# Altium PCB GateDrive.PcbDoc (part 4 of 4)
Units mm, origin at the board's own origin, x right, y up, seen from the top; angles counter-clockwise.
Board outline 204.3 x 129.8 mm, 4 copper layers (Top Layer, Internal Plane 1, Internal Plane 2, Bottom Layer), stack 0.778 mm thick; 412 components, 227 nets, 1153 pads, 570 vias.
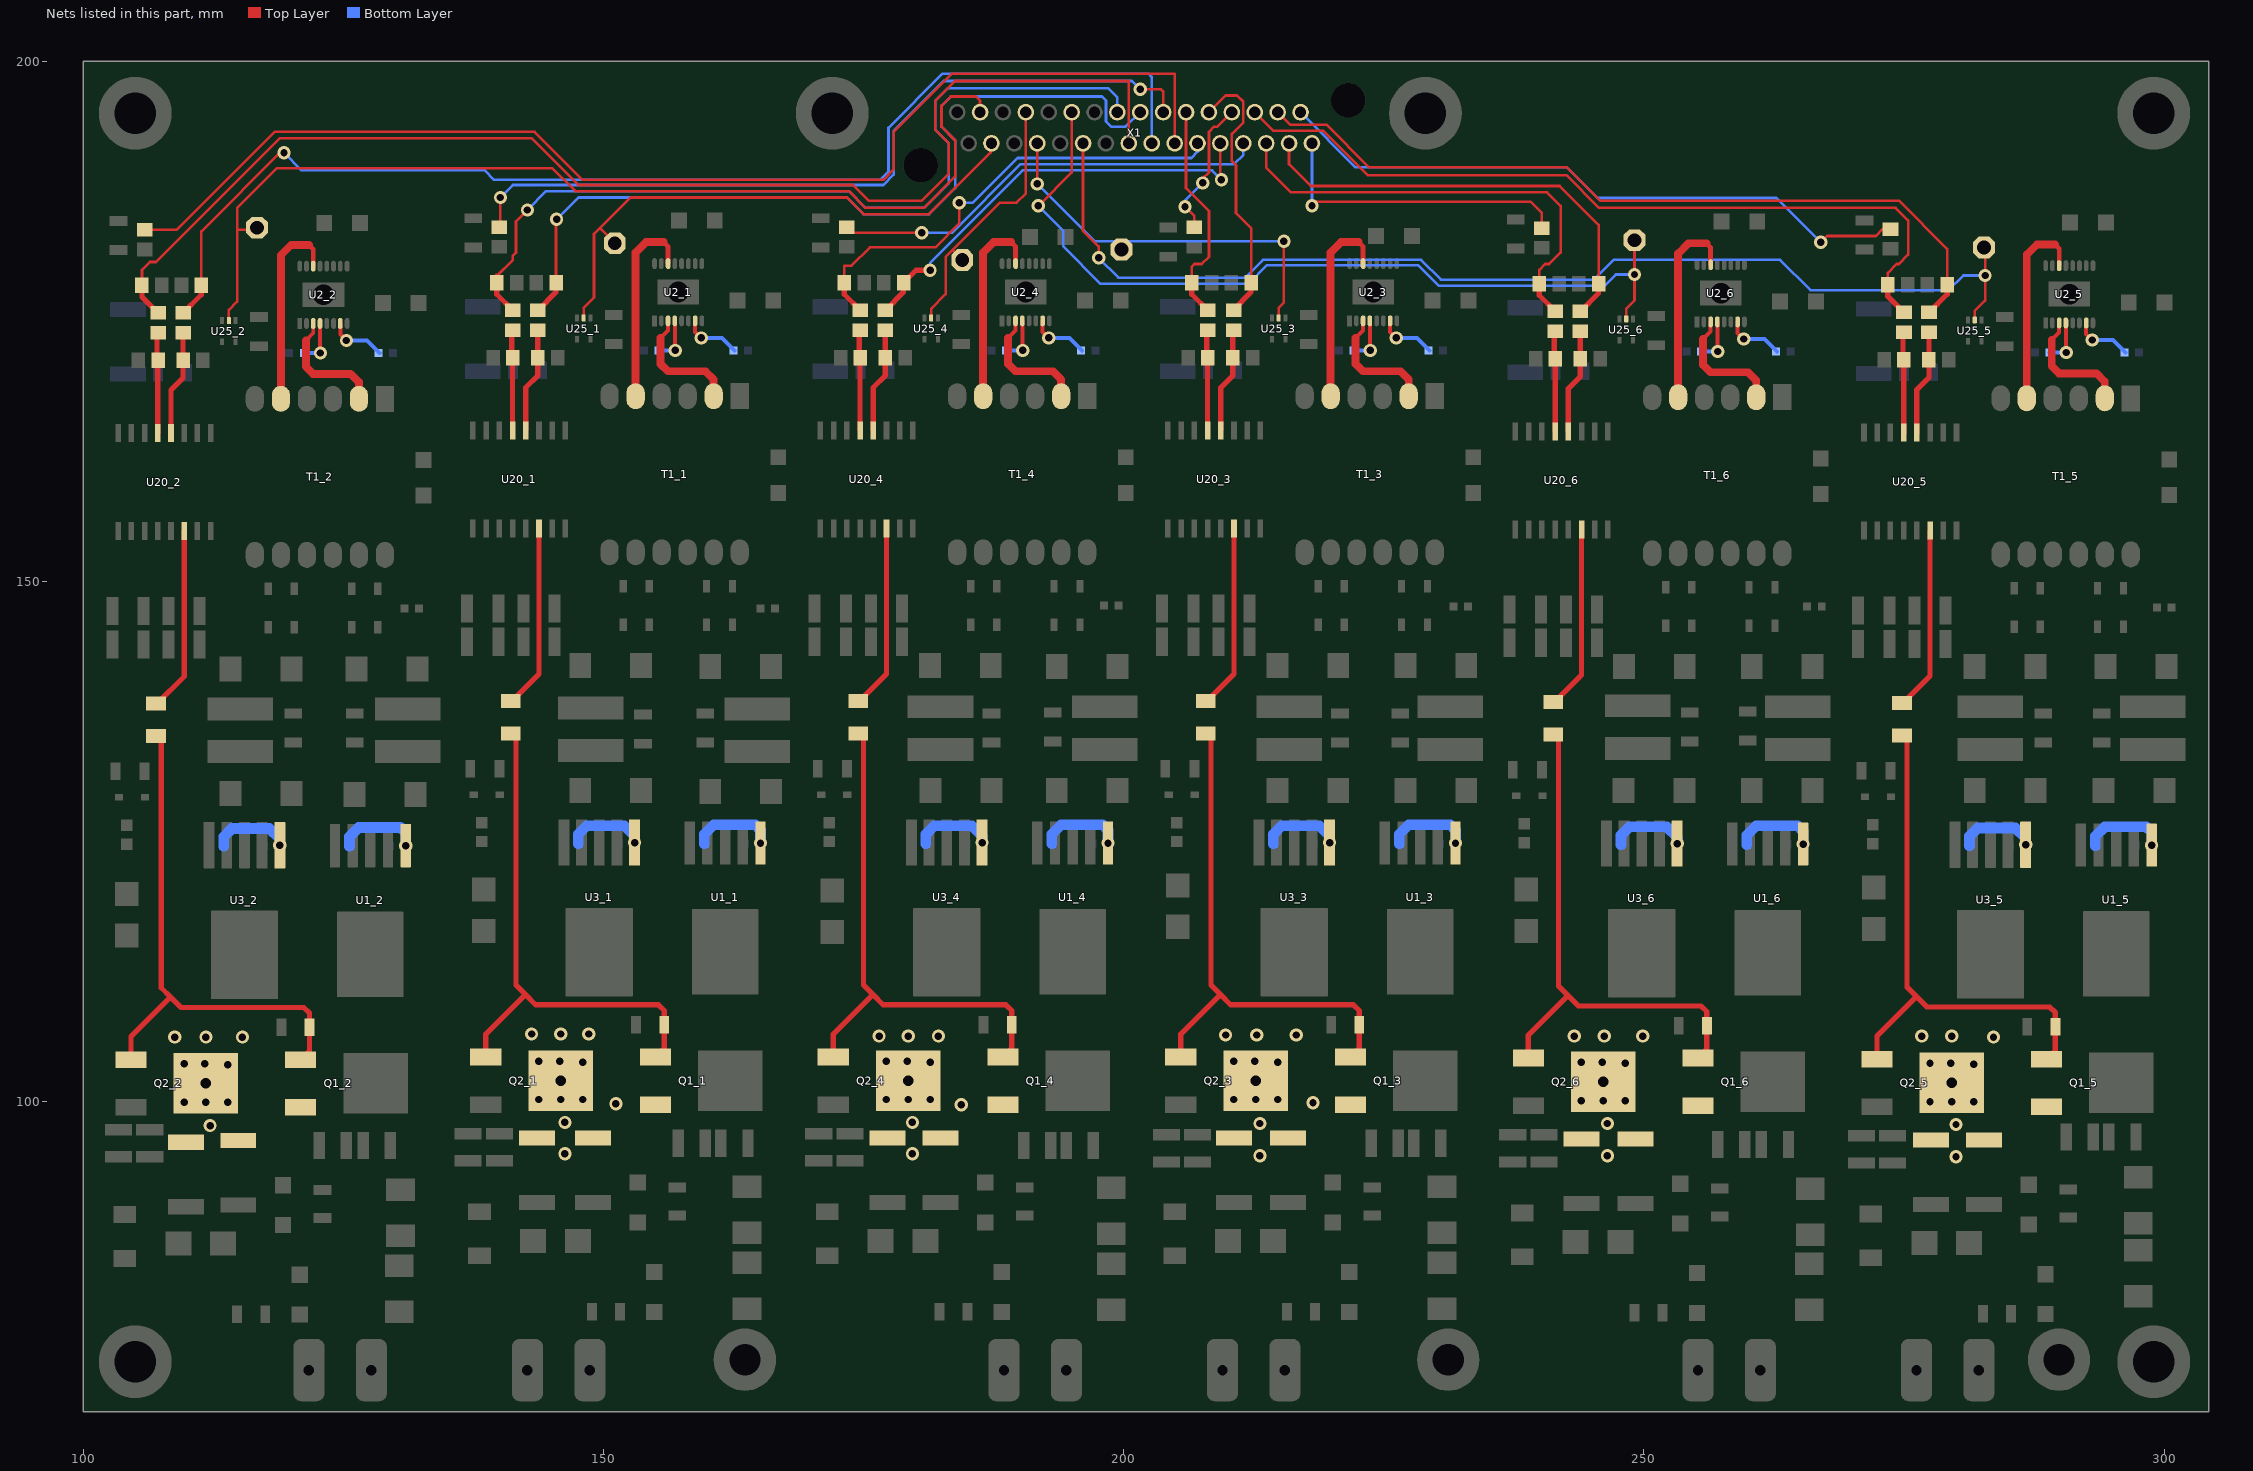
[diagram p5: the nets of this part, all layers, seen from the top]

## Via types
v1: diameter 1.27, hole 0.711, Top Layer to Bottom Layer, 510 vias
v2: diameter 2, hole 1, Top Layer to Bottom Layer, 54 vias
v3: diameter 1.5, hole 1, Top Layer to Bottom Layer, 6 vias

## Nets (pads, with @x,y where several pads share a name; then routed paths per layer and width w, separated by ;. In a path a pad name is that pad's centre, name@x,y a point inside that pad or via, vN(x,y) a via of type N, cw(c..) or ccw(c..) an arc to the next point about the centre after c; other vN are vias at no path point) (continued)
NetQ1_1_1: Q1_1.1 Q2_1.1 R40_1.2 RB1_1.2 | length 52.1
  Top Layer w0.508: Q2_1.1@138.7,104.29 138.7,106.5 142.5,110.3 ; RB1_1.2@141.1,135.4 141.6,134.9 141.6,111.2 142.5,110.3 ; Q1_1.1@155,104.29 155.85,105.14 R40_1.2@155.85,107.4 155.85,108.75 155.3,109.3 143.5,109.3 142.5,110.3
NetQ1_1_3: Q1_1.3 Q2_1.4 RG1_1.1 RG2_1.1
  other v1: 146.3,95 146.3,98 151.2,99.8 143.8,100.2 145.9,100.2 148,100.2 148,103.8 143.8,103.9 145.8,103.9 143.1,106.5 145.9,106.5 148.6,106.5
  other v2: 145.9,102
NetQ1_2_1: Q1_2.1 Q2_2.1 R40_2.2 RB1_2.2 | length 52.1
  Top Layer w0.508: Q2_2.1@104.6,104.04 104.6,106.25 108.4,110.05 ; RB1_2.2@107,135.15 107.5,134.65 107.5,110.95 108.4,110.05 ; Q1_2.1@120.9,104.04 121.75,104.89 R40_2.2@121.75,107.15 121.75,108.5 121.2,109.05 109.4,109.05 108.4,110.05
NetQ1_2_3: Q1_2.3 Q2_2.4 RG1_2.1 RG2_2.1
  other v1: 112.2,97.7 109.7,99.95 111.8,99.95 113.9,99.95 113.9,103.55 109.7,103.65 111.7,103.65 108.8,106.2 111.8,106.2 115.3,106.2
  other v2: 111.8,101.75
NetQ1_3_1: Q1_3.1 Q2_3.1 R40_3.2 RB1_3.2 | length 52.1
  Top Layer w0.508: Q2_3.1@205.5,104.29 205.5,106.5 209.3,110.3 ; RB1_3.2@207.9,135.4 208.4,134.9 208.4,111.2 209.3,110.3 ; Q1_3.1@221.8,104.29 222.65,105.14 R40_3.2@222.65,107.4 222.65,108.75 222.1,109.3 210.3,109.3 209.3,110.3
NetQ1_3_3: Q1_3.3 Q2_3.4 RG1_3.1 RG2_3.1
  other v1: 213.1,94.8 213.1,97.9 218.2,99.9 210.6,100.2 212.7,100.2 214.8,100.2 214.8,103.8 210.6,103.9 212.6,103.9 209.8,106.4 212.8,106.4 216.6,106.4
  other v2: 212.7,102
NetQ1_4_1: Q1_4.1 Q2_4.1 R40_4.2 RB1_4.2 | length 52.1
  Top Layer w0.508: Q2_4.1@172.1,104.29 172.1,106.5 175.9,110.3 ; RB1_4.2@174.5,135.4 175,134.9 175,111.2 175.9,110.3 ; Q1_4.1@188.4,104.29 189.25,105.14 R40_4.2@189.25,107.4 189.25,108.75 188.7,109.3 176.9,109.3 175.9,110.3
NetQ1_4_3: Q1_4.3 Q2_4.4 RG1_4.1 RG2_4.1
  other v1: 179.7,95 179.7,98 184.4,99.7 177.2,100.2 179.3,100.2 181.4,100.2 181.4,103.8 177.2,103.9 179.2,103.9 176.5,106.3 179.3,106.3 182.2,106.3
  other v2: 179.3,102
NetQ1_5_1: Q1_5.1 Q2_5.1 R40_5.2 RB1_5.2 | length 52.1
  Top Layer w0.508: Q2_5.1@272.4,104.09 272.4,106.3 276.2,110.1 ; RB1_5.2@274.8,135.2 275.3,134.7 275.3,111 276.2,110.1 ; Q1_5.1@288.7,104.09 289.55,104.94 R40_5.2@289.55,107.2 289.55,108.55 289,109.1 277.2,109.1 276.2,110.1
NetQ1_5_3: Q1_5.3 Q2_5.4 RG1_5.1 RG2_5.1
  other v1: 280,94.7 280,97.8 277.5,100 279.6,100 281.7,100 281.7,103.6 277.5,103.7 279.5,103.7 283.6,106.2 276.7,106.3 279.6,106.3
  other v2: 279.6,101.8
NetQ1_6_1: Q1_6.1 Q2_6.1 R40_6.2 RB1_6.2 | length 52.1
  Top Layer w0.508: Q2_6.1@238.9,104.19 238.9,106.4 242.7,110.2 ; RB1_6.2@241.3,135.3 241.8,134.8 241.8,111.1 242.7,110.2 ; Q1_6.1@255.2,104.19 256.05,105.04 R40_6.2@256.05,107.3 256.05,108.65 255.5,109.2 243.7,109.2 242.7,110.2
NetQ1_6_3: Q1_6.3 Q2_6.4 RG1_6.1 RG2_6.1
  other v1: 246.5,94.8 246.5,97.9 244,100.1 246.1,100.1 248.2,100.1 248.2,103.7 244,103.8 246,103.8 243.3,106.3 246.2,106.3 249.9,106.3
  other v2: 246.1,101.9
NetR1_1_1: R1_1.1 R2_1.2 U1_1.1 | length 8.1
  Bottom Layer w1.016: R1_1.1@159.7,124.8 159.7,125.7 160.6,126.6 164.6,126.6 165.1,126.1 v1(165.1,124.85)
NetR1_2_1: R1_2.1 R2_2.2 U1_2.1 | length 8.1
  Bottom Layer w1.016: R1_2.1@125.6,124.55 125.6,125.45 126.5,126.35 130.5,126.35 131,125.85 v1(131,124.6)
NetR1_3_1: R1_3.1 R2_3.2 U1_3.1 | length 8.1
  Bottom Layer w1.016: R1_3.1@226.5,124.8 226.5,125.7 227.4,126.6 231.4,126.6 231.9,126.1 v1(231.9,124.85)
NetR1_4_1: R1_4.1 R2_4.2 U1_4.1 | length 8.1
  Bottom Layer w1.016: R1_4.1@193.1,124.8 193.1,125.7 194,126.6 198,126.6 198.5,126.1 v1(198.5,124.85)
NetR1_5_1: R1_5.1 R2_5.2 U1_5.1 | length 8.1
  Bottom Layer w1.016: R1_5.1@293.4,124.6 293.4,125.5 294.3,126.4 298.3,126.4 298.8,125.9 v1(298.8,124.65)
NetR1_6_1: R1_6.1 R2_6.2 U1_6.1 | length 8.1
  Bottom Layer w1.016: R1_6.1@259.9,124.7 259.9,125.6 260.8,126.5 264.8,126.5 265.3,126 v1(265.3,124.75)
NetR3_1_1: R3_1.1 U2_1.4 | length 4.5
  Top Layer w0.381: U2_1.4@156.864,175.044 156.864,172.236 v1(156.9,172.2)
  Bottom Layer w0.381: R3_1.1@155.3,172.2 v1(156.9,172.2)
NetR3_2_1: R3_2.1 U2_2.4 | length 4.5
  Top Layer w0.381: U2_2.4@122.764,174.794 122.764,171.986 v1(122.8,171.95)
  Bottom Layer w0.381: R3_2.1@121.2,171.95 v1(122.8,171.95)
NetR3_3_1: R3_3.1 U2_3.4 | length 4.5
  Top Layer w0.381: U2_3.4@223.664,175.044 223.664,172.236 v1(223.7,172.2)
  Bottom Layer w0.381: R3_3.1@222.1,172.2 v1(223.7,172.2)
NetR3_4_1: R3_4.1 U2_4.4 | length 4.5
  Top Layer w0.381: U2_4.4@190.264,175.044 190.264,172.236 v1(190.3,172.2)
  Bottom Layer w0.381: R3_4.1@188.7,172.2 v1(190.3,172.2)
NetR3_5_1: R3_5.1 U2_5.4 | length 4.5
  Top Layer w0.381: U2_5.4@290.564,174.844 290.564,172.036 v1(290.6,172)
  Bottom Layer w0.381: R3_5.1@289,172 v1(290.6,172)
NetR3_6_1: R3_6.1 U2_6.4 | length 4.5
  Top Layer w0.381: U2_6.4@257.064,174.944 257.064,172.136 v1(257.1,172.1)
  Bottom Layer w0.381: R3_6.1@255.5,172.1 v1(257.1,172.1)
NetR4_1_1: R4_1.1 U2_1.7 | length 5.6
  Top Layer w0.381: U2_1.7@158.814,175.044 158.814,173.986 v1(159.4,173.4)
  Bottom Layer w0.381: v1(159.4,173.4) 161.4,173.4 R4_1.1@162.6,172.2
NetR4_2_1: R4_2.1 U2_2.7 | length 5.6
  Top Layer w0.381: U2_2.7@124.714,174.794 124.714,173.736 v1(125.3,173.15)
  Bottom Layer w0.381: v1(125.3,173.15) 127.3,173.15 R4_2.1@128.5,171.95
NetR4_3_1: R4_3.1 U2_3.7 | length 5.6
  Top Layer w0.381: U2_3.7@225.614,175.044 225.614,173.986 v1(226.2,173.4)
  Bottom Layer w0.381: v1(226.2,173.4) 228.2,173.4 R4_3.1@229.4,172.2
NetR4_4_1: R4_4.1 U2_4.7 | length 5.6
  Top Layer w0.381: U2_4.7@192.214,175.044 192.214,173.986 v1(192.8,173.4)
  Bottom Layer w0.381: v1(192.8,173.4) 194.8,173.4 R4_4.1@196,172.2
NetR4_5_1: R4_5.1 U2_5.7 | length 5.6
  Top Layer w0.381: U2_5.7@292.514,174.844 292.514,173.786 v1(293.1,173.2)
  Bottom Layer w0.381: v1(293.1,173.2) 295.1,173.2 R4_5.1@296.3,172
NetR4_6_1: R4_6.1 U2_6.7 | length 5.6
  Top Layer w0.381: U2_6.7@259.014,174.944 259.014,173.886 v1(259.6,173.3)
  Bottom Layer w0.381: v1(259.6,173.3) 261.6,173.3 R4_6.1@262.8,172.1
NetR6_1_1: R6_1.1 R7_1.2 U3_1.1 | length 7.6
  Bottom Layer w1.016: R6_1.1@147.6,124.8 147.6,125.7 148.4,126.5 152,126.5 153,125.5 v1(153,124.9)
NetR6_2_1: R6_2.1 R7_2.2 U3_2.1 | length 7.6
  Bottom Layer w1.016: R6_2.1@113.5,124.55 113.5,125.45 114.3,126.25 117.9,126.25 118.9,125.25 v1(118.9,124.65)
NetR6_3_1: R6_3.1 R7_3.2 U3_3.1 | length 7.6
  Bottom Layer w1.016: R6_3.1@214.4,124.8 214.4,125.7 215.2,126.5 218.8,126.5 219.8,125.5 v1(219.8,124.9)
NetR6_4_1: R6_4.1 R7_4.2 U3_4.1 | length 7.6
  Bottom Layer w1.016: R6_4.1@181,124.8 181,125.7 181.8,126.5 185.4,126.5 186.4,125.5 v1(186.4,124.9)
NetR6_5_1: R6_5.1 R7_5.2 U3_5.1 | length 7.6
  Bottom Layer w1.016: R6_5.1@281.3,124.6 281.3,125.5 282.1,126.3 285.7,126.3 286.7,125.3 v1(286.7,124.7)
NetR6_6_1: R6_6.1 R7_6.2 U3_6.1 | length 7.6
  Bottom Layer w1.016: R6_6.1@247.8,124.7 247.8,125.6 248.6,126.4 252.2,126.4 253.2,125.4 v1(253.2,124.8)
NetR45_1_1: R45_1.1 R94_1.1 U20_1.13 | length 9.7
  Top Layer w0.508: R94_1.1@141.2,174.15 141.2,171.54 141.27,171.47 U20_1.13@141.27,164.5
NetR45_2_1: R45_2.1 R94_2.1 U20_2.13 | length 9.7
  Top Layer w0.508: R94_2.1@107.1,173.9 107.1,171.29 107.17,171.22 U20_2.13@107.17,164.25
NetR45_3_1: R45_3.1 R94_3.1 U20_3.13 | length 9.7
  Top Layer w0.508: R94_3.1@208,174.15 208,171.54 208.07,171.47 U20_3.13@208.07,164.5
NetR45_4_1: R45_4.1 R94_4.1 U20_4.13 | length 9.7
  Top Layer w0.508: R94_4.1@174.6,174.15 174.6,171.54 174.67,171.47 U20_4.13@174.67,164.5
NetR45_5_1: R45_5.1 R94_5.1 U20_5.13 | length 9.7
  Top Layer w0.508: R94_5.1@274.9,173.95 274.9,171.34 274.97,171.27 U20_5.13@274.97,164.3
NetR45_6_1: R45_6.1 R94_6.1 U20_6.13 | length 9.7
  Top Layer w0.508: R94_6.1@241.4,174.05 241.4,171.44 241.47,171.37 U20_6.13@241.47,164.4
NetR46_1_1: R46_1.1 R93_1.1 U20_1.12 | length 10.1
  Top Layer w0.508: U20_1.12@142.54,164.5 142.54,168.64 143.7,169.8 R46_1.1@143.7,171.5 R93_1.1@143.7,174.15
NetR46_2_1: R46_2.1 R93_2.1 U20_2.12 | length 10.1
  Top Layer w0.508: U20_2.12@108.44,164.25 108.44,168.39 109.6,169.55 R46_2.1@109.6,171.25 R93_2.1@109.6,173.9
NetR46_3_1: R46_3.1 R93_3.1 U20_3.12 | length 10.1
  Top Layer w0.508: U20_3.12@209.34,164.5 209.34,168.64 210.5,169.8 R46_3.1@210.5,171.5 R93_3.1@210.5,174.15
NetR46_4_1: R46_4.1 R93_4.1 U20_4.12 | length 10.1
  Top Layer w0.508: U20_4.12@175.94,164.5 175.94,168.64 177.1,169.8 R46_4.1@177.1,171.5 R93_4.1@177.1,174.15
NetR46_5_1: R46_5.1 R93_5.1 U20_5.12 | length 10.1
  Top Layer w0.508: U20_5.12@276.24,164.3 276.24,168.44 277.4,169.6 R46_5.1@277.4,171.3 R93_5.1@277.4,173.95
NetR46_6_1: R46_6.1 R93_6.1 U20_6.12 | length 10.1
  Top Layer w0.508: U20_6.12@242.74,164.4 242.74,168.54 243.9,169.7 R46_6.1@243.9,171.4 R93_6.1@243.9,174.05
NetR47_1_2: R47_1.2 X1.19 | length 76.1
  Top Layer w0.254: R47_1.2@140,184.05 140.1,184.15 v1(140.1,186.9) ; v1(201.6,197.3) 203.6,197.3 203.8,197.1 X1.19@203.8,195.1
  Bottom Layer w0.254: v1(140.1,186.9) 141.3,188.1 176.9,188.1 177.9,189.1 177.9,193.3 182.7,198.1 200.8,198.1 v1(201.6,197.3)
NetR47_2_2: R47_2.2 X1.20 | length 117.8
  Top Layer w0.254: R47_2.2@105.9,183.8 109,183.8 118.4,193.2 143.4,193.2 148,188.6 176.9,188.6 177.9,189.6 177.9,193.2 183.5,198.8 204.9,198.8 X1.20@204.9,192.1
NetR47_3_2: R47_3.2 X1.25 | length 13.5
  Top Layer w0.254: v1(205.9,186) 206.8,185.1 R47_3.2@206.8,184.05 ; v1(207.6,188.3) 207.6,188.7 208.2,189.3 208.2,193.2 208.7,193.7 209,193.7 X1.25@210.4,195.1
  Bottom Layer w0.254: v1(205.9,186) 205.9,186.6 v1(207.6,188.3)
NetR47_4_2: R47_4.2 X1.26 | length 42.5
  Top Layer w0.254: R47_4.2@173.4,184.05 173.95,183.5 v1(180.6,183.5)
  Bottom Layer w0.254: v1(180.6,183.5) 183.5,183.5 190.1,190.1 210.6,190.1 211.5,191 X1.26@211.5,192.1
NetR47_5_2: R47_5.2 X1.31 | length 62.4
  Top Layer w0.254: v1(267,182.6) 267.6,183.2 272.3,183.2 272.95,183.85 R47_5.2@273.7,183.85
  Bottom Layer w0.254: X1.31@217,195.1 222.3,189.8 242.6,189.8 245.55,186.85 262.75,186.85 v1(267,182.6)
NetR47_6_2: R47_6.2 X1.32 | length 30.2
  Top Layer w0.254: v1(218.1,186.1) 218.5,186.5 239.1,186.5 240.2,185.4 R47_6.2@240.2,183.95
  Bottom Layer w0.254: v1(218.1,186.1) X1.32@218.1,192.1
NetR93_1_2: R93_1.2 R95_1.1 X1.17 | length 81.2
  Top Layer w0.254: R95_1.1@145.45,178.7 v1@145.45,184.75
  Top Layer w0.508: R93_1.2@143.7,176.05 145.45,177.8 R95_1.1@145.45,178.7 ; v1@145.45,184.75 v1(145.5,184.8)
  Bottom Layer w0.254: v1(145.5,184.8) 147.6,186.9 173.4,186.9 175,185.3 181.3,185.3 183.8,187.8 183.8,192.4 182.5,193.7 182.5,195.7 183.4,196.6 197.9,196.6 198.3,196.2 198.3,194.2 198.8,193.7 200.2,193.7 X1.17@201.6,195.1
NetR93_2_2: R93_2.2 R95_2.1 X1.18 | length 117.7
  Top Layer w0.254: R95_2.1@111.35,178.45 111.35,183.65 119.2,191.5 119.3,191.4 v1(119.3,191.2)
  Top Layer w0.508: R93_2.2@109.6,175.8 111.35,177.55 R95_2.1@111.35,178.45
  Bottom Layer w0.254: v1(119.3,191.2) 121,189.5 138.6,189.5 139.5,188.6 176.6,188.6 177.4,189.4 177.4,193.6 182.6,198.8 202.4,198.8 202.7,198.5 X1.18@202.7,192.1
NetR93_3_2: R93_3.2 R95_3.1 X1.23 | length 26.2
  Top Layer w0.254: X1.23@208.2,195.1 209.8,196.7 210.9,196.7 211.5,196.1 211.5,194.1 210.4,193 210.4,190.4 210.8,190 210.8,185.4 212.25,183.95 R95_3.1@212.25,178.7
  Top Layer w0.508: R93_3.2@210.5,176.05 212.25,177.8 R95_3.1@212.25,178.7
NetR93_4_2: R93_4.2 R95_4.1 X1.24 | length 42.7
  Top Layer w0.254: X1.24@209.3,192.1 209.3,188.7 v1(209.4,188.6)
  Top Layer w0.508: R93_4.2@177.1,176.05 178.85,177.8 R95_4.1@178.85,178.7 180.05,179.9 v1(181.4,179.9)
  Bottom Layer w0.254: v1(181.4,179.9) 181.4,180.6 190.3,189.5 208.5,189.5 v1(209.4,188.6)
NetR93_5_2: R93_5.2 R95_5.1 X1.29 | length 76.6
  Top Layer w0.254: X1.29@214.8,195.1 216,193.9 219.5,193.9 223.6,189.8 242.6,189.8 245.8,186.6 274.5,186.6 279.15,181.95 R95_5.1@279.15,178.5
  Top Layer w0.508: R93_5.2@277.4,175.85 279.15,177.6 R95_5.1@279.15,178.5
NetR93_6_2: R93_6.2 R95_6.1 X1.30 | length 43.2
  Top Layer w0.254: X1.30@215.9,192.1 215.9,190.1 218,188 241.9,188 245.65,184.25 R95_6.1@245.65,178.6
  Top Layer w0.508: R93_6.2@243.9,175.95 245.65,177.7 R95_6.1@245.65,178.6
NetR94_1_2: R94_1.2 R96_1.1 X1.15 | length 82.6
  Top Layer w0.254: R96_1.1@139.75,179.35 141.3,180.9 141.3,181.3 141.6,181.6 141.6,184.6 v1(142.7,185.7)
  Top Layer w0.508: R96_1.1@139.75,179.35 R96_1.1@139.75,178.7 139.75,177.6 R94_1.2@141.3,176.05
  Bottom Layer w0.254: v1(142.7,185.7) 144.5,187.5 173.6,187.5 175.2,185.9 180.8,185.9 183.2,188.3 183.2,192.1 181.9,193.4 181.9,196.2 183.1,197.4 198.5,197.4 199.4,196.5 X1.15@199.4,195.096
NetR94_2_2: R94_2.2 R96_2.1 X1.16 | length 124.1
  Top Layer w0.254: R96_2.1@105.65,178.45 105.65,179.95 106.4,180.7 107,180.7 118.9,192.6 143.1,192.6 147.6,188.1 174,188.1 175.5,186.6 180.6,186.6 183.2,189.2 183.2,192.1 181.9,193.4 181.9,196.2 183.8,198.1 200.5,198.1 X1.16@200.5,192.1
  Top Layer w0.508: R96_2.1@105.65,178.45 105.65,177.35 R94_2.2@107.2,175.8
NetR94_3_2: R94_3.2 R96_3.1 X1.21 | length 21.7
  Top Layer w0.254: X1.21@206,195.1 206,187.8 208.2,185.6 208.2,181.2 207.5,180.5 206.8,180.5 206.55,180.25 R96_3.1@206.55,178.7
  Top Layer w0.508: R96_3.1@206.55,178.7 206.55,177.6 R94_3.2@208.1,176.05
NetR94_4_2: R94_4.2 R96_4.1 X1.22 | length 45.4
  Top Layer w0.254: R96_4.1@173.15,178.7 173.15,180.35 173.85,180.35 175.6,182.1 181.9,182.1 184.2,184.4 v1(184.2,186.4)
  Top Layer w0.508: R96_4.1@173.15,178.7 173.15,177.6 R94_4.2@174.7,176.05
  Bottom Layer w0.254: v1(184.2,186.4) 185.5,186.4 189.8,190.7 206.5,190.7 207.1,191.3 X1.22@207.1,192.1
NetR94_5_2: R94_5.2 R96_5.1 X1.27 | length 77.5
  Top Layer w0.254: X1.27@212.6,195.1 214.4,193.3 219.2,193.3 223.45,189.05 242.55,189.05 245.7,185.9 274.2,185.9 275.4,184.7 275.4,181.4 274.5,180.5 274.3,180.5 273.45,179.65 R96_5.1@273.45,178.5
  Top Layer w0.508: R96_5.1@273.45,178.5 273.45,177.4 R94_5.2@275,175.85
NetR94_6_2: R94_6.2 R96_6.1 X1.28 | length 44
  Top Layer w0.254: X1.28@213.7,192.1 213.7,189.8 216.1,187.4 240.7,187.4 242,186.1 242,181.6 240.9,180.5 240.5,180.5 239.95,179.95 R96_6.1@239.95,178.6
  Top Layer w0.508: R96_6.1@239.95,178.6 239.95,177.5 R94_6.2@241.5,175.95
NetRB1_1_1: RB1_1.1 U20_1.6 | length 17.8
  Top Layer w0.508: RB1_1.1@141.1,138.5 141.2,138.5 143.81,141.11 U20_1.6@143.81,155.102
NetRB1_2_1: RB1_2.1 U20_2.6 | length 17.8
  Top Layer w0.508: RB1_2.1@107,138.25 107.1,138.25 109.71,140.86 U20_2.6@109.71,154.852
NetRB1_3_1: RB1_3.1 U20_3.6 | length 17.8
  Top Layer w0.508: RB1_3.1@207.9,138.5 208,138.5 210.61,141.11 U20_3.6@210.61,155.102
NetRB1_4_1: RB1_4.1 U20_4.6 | length 17.8
  Top Layer w0.508: RB1_4.1@174.5,138.5 174.6,138.5 177.21,141.11 U20_4.6@177.21,155.102
NetRB1_5_1: RB1_5.1 U20_5.6 | length 17.8
  Top Layer w0.508: RB1_5.1@274.8,138.3 274.9,138.3 277.51,140.91 U20_5.6@277.51,154.902
NetRB1_6_1: RB1_6.1 U20_6.6 | length 17.8
  Top Layer w0.508: RB1_6.1@241.3,138.4 241.4,138.4 244.01,141.01 U20_6.6@244.01,155.002
NetT1_1_2: T1_1.2 U2_1.3 | length 11.8
  Top Layer w0.381: 155.5,173.4 156.214,174.114 U2_1.3@156.214,175.044
  Top Layer w0.762: 155.5,173.4 155.5,170.9 156.2,170.2 159.8,170.2 160.6,169.4 T1_1.2@160.6,167.8
NetT1_1_5: T1_1.5 U2_1.14 | length 19.1
  Top Layer w0.457: 155.8,182.6 156.214,182.186 U2_1.14@156.214,180.544
  Top Layer w0.762: T1_1.5@153.1,167.8 153.1,181.6 154.1,182.6 155.8,182.6
NetT1_2_2: T1_2.2 U2_2.3 | length 11.8
  Top Layer w0.381: 121.4,173.15 122.114,173.864 U2_2.3@122.114,174.794
  Top Layer w0.762: 121.4,173.15 121.4,170.65 122.1,169.95 125.7,169.95 126.5,169.15 T1_2.2@126.5,167.55
NetT1_2_5: T1_2.5 U2_2.14 | length 19.1
  Top Layer w0.457: 121.7,182.35 122.114,181.936 U2_2.14@122.114,180.294
  Top Layer w0.762: T1_2.5@119,167.55 119,181.35 120,182.35 121.7,182.35
NetT1_3_2: T1_3.2 U2_3.3 | length 11.8
  Top Layer w0.381: 222.3,173.4 223.014,174.114 U2_3.3@223.014,175.044
  Top Layer w0.762: 222.3,173.4 222.3,170.9 223,170.2 226.6,170.2 227.4,169.4 T1_3.2@227.4,167.8
NetT1_3_5: T1_3.5 U2_3.14 | length 19.1
  Top Layer w0.457: 222.6,182.6 223.014,182.186 U2_3.14@223.014,180.544
  Top Layer w0.762: T1_3.5@219.9,167.8 219.9,181.6 220.9,182.6 222.6,182.6
NetT1_4_2: T1_4.2 U2_4.3 | length 11.8
  Top Layer w0.381: 188.9,173.4 189.614,174.114 U2_4.3@189.614,175.044
  Top Layer w0.762: 188.9,173.4 188.9,170.9 189.6,170.2 193.2,170.2 194,169.4 T1_4.2@194,167.8
NetT1_4_5: T1_4.5 U2_4.14 | length 19.1
  Top Layer w0.457: 189.2,182.6 189.614,182.186 U2_4.14@189.614,180.544
  Top Layer w0.762: T1_4.5@186.5,167.8 186.5,181.6 187.5,182.6 189.2,182.6
NetT1_5_2: T1_5.2 U2_5.3 | length 11.8
  Top Layer w0.381: 289.2,173.2 289.914,173.914 U2_5.3@289.914,174.844
  Top Layer w0.762: 289.2,173.2 289.2,170.7 289.9,170 293.5,170 294.3,169.2 T1_5.2@294.3,167.6
NetT1_5_5: T1_5.5 U2_5.14 | length 19.1
  Top Layer w0.457: 289.5,182.4 289.914,181.986 U2_5.14@289.914,180.344
  Top Layer w0.762: T1_5.5@286.8,167.6 286.8,181.4 287.8,182.4 289.5,182.4
NetT1_6_2: T1_6.2 U2_6.3 | length 11.8
  Top Layer w0.381: 255.7,173.3 256.414,174.014 U2_6.3@256.414,174.944
  Top Layer w0.762: 255.7,173.3 255.7,170.8 256.4,170.1 260,170.1 260.8,169.3 T1_6.2@260.8,167.7
NetT1_6_5: T1_6.5 U2_6.14 | length 19.1
  Top Layer w0.457: 256,182.5 256.414,182.086 U2_6.14@256.414,180.444
  Top Layer w0.762: T1_6.5@253.3,167.7 253.3,181.5 254.3,182.5 256,182.5
PA8/TIM_CH1: TP2.TP U25_1.2 X1.4 | length 54.3
  Top Layer w0.254: U25_1.2@148.1,175.325 148.1,176.3 149.1,177.3 149.1,183.4 149.75,184.05 ; TP2.TP@151.1,182.5 149.75,183.85 149.75,184.05 ; X1.4@187.3,192.1 187.2,192.1 187.2,191.2 181.3,185.3 175,185.3 173.4,186.9 152.6,186.9 149.75,184.05
PA9/TIM_CH2: TP4.TP U25_3.2 X1.8 | length 37.5
  Top Layer w0.254: v1(191.7,188.2) X1.8@191.7,192.1 ; U25_3.2@214.9,175.325 214.9,176.3 215.4,176.8 v1(215.4,182.7)
  Bottom Layer w0.254: v1(191.7,188.2) 197.2,182.7 v1(215.4,182.7)
PA10/TIM1_CH3: TP6.TP U25_5.2 X1.12 | length 109.1
  Top Layer w0.254: X1.12@196.1,192.1 196.1,183.7 197.6,182.2 v1(197.6,181.1) ; U25_5.2@281.8,175.125 281.8,176 282.8,177 v1(282.8,179.4) 282.8,182 TP6.TP@282.7,182.1
  Bottom Layer w0.254: v1(197.6,181.1) 199.5,179.2 211.7,179.2 213.4,180.9 228.6,180.9 230.5,179 245.2,179 247.1,180.9 263.1,180.9 266,178 279.3,178 280.7,179.4 v1(282.8,179.4)
TIM1_CH1N: TP1.TP U25_2.2 X1.3 | length 99.2
  Top Layer w0.254: U25_2.2@114,175.075 114,176.1 114.8,176.9 114.8,183.8 ; TP1.TP@116.7,184 116.5,183.8 114.8,183.8 ; X1.3@186.2,195.1 186.2,196.2 185.8,196.6 183.4,196.6 182.5,195.7 182.5,193.7 183.8,192.4 183.8,188.9 180.8,185.9 175.2,185.9 173.6,187.5 147.3,187.5 145.1,189.7 118.6,189.7 114.8,185.9 114.8,183.8
TIM1_CH2N: TP3.TP U25_4.2 X1.7 | length 25.9
  Top Layer w0.254: U25_4.2@181.5,175.325 181.5,176.2 182.9,177.6 182.9,181.2 183.5,181.8 ; TP3.TP@184.5,180.9 183.6,181.8 183.5,181.8 ; X1.7@190.6,195.1 190.6,187.3 189.7,186.4 188.1,186.4 183.5,181.8
TIM1_CH3N: TP5.TP U25_6.2 X1.11 | length 81.5
  Top Layer w0.254: v1(191.8,186.1) 195,189.3 X1.11@195,195.1 ; U25_6.2@248.3,175.225 248.3,176.2 249.1,177 v1(249.1,179.5) TP5.TP@249.1,182.8
  Bottom Layer w0.254: v1(191.8,186.1) 194.2,183.7 194.2,182.2 197.8,178.6 212,178.6 213.8,180.4 228.3,180.4 230.3,178.4 246.2,178.4 247.3,179.5 v1(249.1,179.5)
pads on no net: T1_1.6 T1_1.11 T1_2.6 T1_2.11 T1_3.6 T1_3.11 T1_4.6 T1_4.11 T1_5.6 T1_5.11 T1_6.6 T1_6.11 U2_1.2 U2_1.8 U2_1.9 U2_1.12 U2_1.15 U2_2.2 U2_2.8 U2_2.9 U2_2.12 U2_2.15 U2_3.2 U2_3.8 U2_3.9 U2_3.12 U2_3.15 U2_4.2 U2_4.8 U2_4.9 U2_4.12 U2_4.15 U2_5.2 U2_5.8 U2_5.9 U2_5.12 U2_5.15 U2_6.2 U2_6.8 U2_6.9 U2_6.12 U2_6.15 U20_1.4 U20_1.7 U20_2.4 U20_2.7 U20_3.4 U20_3.7 U20_4.4 U20_4.7 U20_5.4 U20_5.7 U20_6.4 U20_6.7 U25_1.1 U25_2.1 U25_3.1 U25_4.1 U25_5.1 U25_6.1 X1.33 X1.34
copper on no net:
  other v1: 117.1,99.55 284.9,99.6 251.4,99.7

## Polygon pours and split planes (outlines as drawn)
-8.5VT5 on Top Layer "-8.5VT5_L01_P428" (solid, pour order 428): 269.6,95.8 275.2,95.8 275.2,102.5 269.6,102.5
-8.5VT6 on Top Layer "-8.5VT6_L01_P426" (solid, pour order 426): 236.1,96 241.7,96 241.7,102.5 241.7,102.6 236.1,102.6
-8.5VT3 on Top Layer "-8.5VT3_L01_P424" (solid, pour order 424): 202.8,96 208.4,96 208.4,102.5 202.8,102.5
-8.5VT4 on Top Layer "-8.5VT4_L01_P422" (solid, pour order 422): 169.4,96 175,96 175,102.5 169.4,102.5
-8.5VT1 on Top Layer "-8.5VT1_L01_P420" (solid, pour order 420): 135.5,96 141.4,96 141.4,102.5 135.5,102.5
-8.5VT2 on Top Layer "-8.5VT2_L01_P418" (solid, pour order 418): 107.7,96.6 107.7,102.5 102,102.5 102,96.6
+15VT5 on Top Layer "+15VT5_L01_P306" (solid, pour order 306): 291.2,102.3 291.2,107.3 301.1,107.3 301.1,94.3 296.2,94.3 296.2,98.5 292.2,98.5 292.2,102.3
+15VT4 on Top Layer "+15VT4_L01_P282" (solid, pour order 282): 190.9,102.5 190.9,107.5 200.8,107.5 200.8,94 195.9,94 195.9,98.7 191.9,98.7 191.9,102.5
+15VT1 on Top Layer "+15VT1_L01_P014" (solid, pour order 14): 157.5,102.5 157.5,107.5 167.4,107.5 167.4,94 162.5,94 162.5,98.7 158.5,98.7 158.5,102.5
NetQ1_4_3 on Top Layer "NETQ1_4_3_L01_P278" (solid, pour order 278): 175.6,107.5 175.6,94.008 185.216,94.008 185.216,98.3 189.5,98.3 189.5,101.508 184.216,101.508 184.216,107.5
COMMON5 on Top Layer "COMMON5_L01_P310" (solid, pour order 310): 289.9,118.8 301,118.8 301.1,118.7 301.1,108.4 291.2,108.4 291.2,109.9 289.9,111.2
COMMON6 on Top Layer "COMMON6_L01_P334" (solid, pour order 334): 256.4,118.9 267.5,118.9 267.6,118.8 267.6,108.5 257.7,108.5 257.7,110 256.4,111.3
IGBT6_G on Top Layer "IGBT6_G_L01_P324" (solid, pour order 324): 240.7,84.1 240.7,80.6 243.7,80.6 247.7,76.6 250.1,76.6 250.1,81.8 250.2,81.9 245.1,81.9 245.1,84.1
+15VT6 on Top Layer "+15VT6_L01_P330" (solid, pour order 330): 257.7,102.4 257.7,107.4 267.4,107.4 267.4,93.9 262.7,93.9 262.7,98.6 258.7,98.6 258.7,102.4
NetQ1_6_3 on Top Layer "NETQ1_6_3_L01_P326" (solid, pour order 326): 242.2,107.4 242.2,93.908 252.016,93.908 252.016,98.2 255.9,98.2 255.9,101.408 251.016,101.408 251.016,107.4
NetQ1_5_3 on Top Layer "NETQ1_5_3_L01_P302" (solid, pour order 302): 275.7,107.3 275.7,93.808 285.516,93.808 285.516,98.4 289.4,98.4 289.4,101.308 284.516,101.308 284.516,107.3
IGBT3_G on Top Layer "IGBT3_G_L01_P252" (solid, pour order 252): 207.3,84.2 207.3,80.7 210.3,80.7 214.3,76.7 216.7,76.7 216.7,81.9 216.8,82 211.7,82 211.7,84.2
NetQ1_3_3 on Top Layer "NETQ1_3_3_L01_P254" (solid, pour order 254): 208.9,107.5 208.9,94.008 218.616,94.008 218.616,98.5 222.5,98.5 222.5,101.508 217.616,101.508 217.616,107.5
+15VT3 on Top Layer "+15VT3_L01_P258" (solid, pour order 258): 224.3,102.5 224.3,107.5 233.9,107.5 233.9,94 229.3,94 229.3,98.7 225.3,98.7 225.3,102.5
NetC8_3_2 on Top Layer "NETC8_3_2_L01_P264" (solid, pour order 264): 209.8,119.8 222.5,119.8 222.5,110.1 221.7,110.1 210.8,110.1 210.8,110.3 209.8,111.3
COMMON4 on Top Layer "COMMON4_L01_P286" (solid, pour order 286): 189.6,119 200.7,119 200.8,118.9 200.8,108.6 190.9,108.6 190.9,110.1 189.6,111.4
IGBT4_G on Top Layer "IGBT4_G_L01_P276" (solid, pour order 276): 173.9,84.2 173.9,80.7 176.9,80.7 180.9,76.7 183.3,76.7 183.3,81.9 183.4,82 178.3,82 178.3,84.2
IGBT2_G on Top Layer "IGBT2_G_L01_P408" (solid, pour order 408): 111.7,91.75 107,91.75 107,88.05 105.7,86.75 101.9,86.75 101.9,83.45 110.8,83.45 110.8,88.15 111.7,89.05
+15VT2 on Top Layer "+15VT2_L01_P400" (solid, pour order 400): 123.4,102.25 123.4,107.25 133.3,107.25 133.3,93.75 128.4,93.75 128.4,98.45 124.4,98.45 124.4,102.25
NetQ1_2_3 on Top Layer "NETQ1_2_3_L01_P404" (solid, pour order 404): 108.2,107.25 108.2,93.758 117.716,93.758 117.716,98.3 121.5,98.3 121.5,101.258 116.716,101.258 116.716,107.25
IGBT2_G on Top Layer "IGBT2_G_L01_P406" (solid, pour order 406): 106.4,83.95 106.4,80.45 109.4,80.45 113.4,76.45 115.8,76.45 115.8,81.65 115.9,81.75 110.8,81.75 110.8,83.95
NetD27_2_2 on Top Layer "NETD27_2_2_L01_P402" (solid, pour order 402): 115.361,82.75 111.591,82.75 111.591,87.523 112.6,88.532 112.6,91.723 117.591,91.723 117.591,85.723
NetD30_2_2 on Top Layer "NETD30_2_2_L01_P398" (solid, pour order 398): 118.4,89.75 121.1,89.75 121.1,90.05 124.6,90.05 124.6,81.95 118.4,81.95
NetC8_2_2 on Top Layer "NETC8_2_2_L01_P396" (solid, pour order 396): 108.9,119.55 121.5,119.55 121.5,109.85 120.8,109.85 109.9,109.85 109.9,110.05 108.9,111.05
COMMON2 on Top Layer "COMMON2_L01_P394" (solid, pour order 394): 122.1,118.75 133.2,118.75 133.3,118.65 133.3,108.35 123.4,108.35 123.4,109.85 122.1,111.15
COMMON3 on Top Layer "COMMON3_L01_P262" (solid, pour order 262): 223,119 234.1,119 234.2,118.9 234.2,108.6 224.3,108.6 224.3,110.1 223,111.4
NetC8_6_2 on Top Layer "NETC8_6_2_L01_P336" (solid, pour order 336): 243.2,119.7 255.2,119.7 255.2,109.9 255.1,110 244.2,110 244.2,110.2 243.2,111.2
NetD30_6_2 on Top Layer "NETD30_6_2_L01_P332" (solid, pour order 332): 252.7,89.9 255.4,89.9 255.4,90.2 259.2,90.2 259.2,82.1 252.7,82.1
NetD27_6_2 on Top Layer "NETD27_6_2_L01_P328" (solid, pour order 328): 249.661,82.9 245.891,82.9 245.891,87.673 246.9,88.682 246.9,91.873 251.891,91.873 251.891,85.873
IGBT6_G on Top Layer "IGBT6_G_L01_P322" (solid, pour order 322): 246,91.9 241.3,91.9 241.3,88.2 240,86.9 236.2,86.9 236.2,83.6 245.1,83.6 245.1,88.3 246,89.2
NetC8_5_2 on Top Layer "NETC8_5_2_L01_P312" (solid, pour order 312): 276.7,119.6 289.4,119.6 289.4,109.9 288.6,109.9 277.7,109.9 277.7,110.1 276.7,111.1
NetD30_5_2 on Top Layer "NETD30_5_2_L01_P308" (solid, pour order 308): 286.2,89.8 288.9,89.8 288.9,90.1 292.7,90.1 292.7,82 286.2,82
NetD27_5_2 on Top Layer "NETD27_5_2_L01_P304" (solid, pour order 304): 283.161,82.8 279.391,82.8 279.391,87.573 280.4,88.582 280.4,91.773 285.391,91.773 285.391,85.773
IGBT5_G on Top Layer "IGBT5_G_L01_P300" (solid, pour order 300): 274.2,84 274.2,80.5 277.2,80.5 281.2,76.5 283.6,76.5 283.6,81.7 283.7,81.8 278.6,81.8 278.6,84
IGBT5_G on Top Layer "IGBT5_G_L01_P298" (solid, pour order 298): 279.5,91.8 274.8,91.8 274.8,88.1 273.5,86.8 269.7,86.8 269.7,83.5 278.6,83.5 278.6,88.2 279.5,89.1
NetC8_4_2 on Top Layer "NETC8_4_2_L01_P288" (solid, pour order 288): 176.4,119.8 189,119.8 189,110.1 188.3,110.1 177.4,110.1 177.4,110.3 176.4,111.3
NetD30_4_2 on Top Layer "NETD30_4_2_L01_P284" (solid, pour order 284): 185.9,90 188.6,90 188.6,90.3 192.4,90.3 192.4,82.2 185.9,82.2
NetD27_4_2 on Top Layer "NETD27_4_2_L01_P280" (solid, pour order 280): 182.861,83 179.091,83 179.091,87.773 180.1,88.782 180.1,91.973 185.091,91.973 185.091,85.973
IGBT4_G on Top Layer "IGBT4_G_L01_P274" (solid, pour order 274): 179.2,92 174.5,92 174.5,88.3 173.2,87 169.4,87 169.4,83.7 178.3,83.7 178.3,88.4 179.2,89.3
NetD30_3_2 on Top Layer "NETD30_3_2_L01_P260" (solid, pour order 260): 219.3,90 222,90 222,90.3 225.8,90.3 225.8,82.2 219.3,82.2
NetD27_3_2 on Top Layer "NETD27_3_2_L01_P256" (solid, pour order 256): 216.261,83 212.491,83 212.491,87.773 213.5,88.782 213.5,91.973 218.491,91.973 218.491,85.973
IGBT3_G on Top Layer "IGBT3_G_L01_P250" (solid, pour order 250): 212.6,92 207.9,92 207.9,88.3 206.6,87 202.8,87 202.8,83.7 211.7,83.7 211.7,88.4 212.6,89.3
NetC8_1_2 on Top Layer "NETC8_1_2_L01_P026" (solid, pour order 26): 143,119.8 155.4,119.8 155.4,110.1 154.9,110.1 144,110.1 144,110.3 143,111.3
COMMON1 on Top Layer "COMMON1_L01_P022" (solid, pour order 22): 156.2,119 167.3,119 167.4,118.9 167.4,108.6 157.5,108.6 157.5,110.1 156.2,111.4
NetD30_1_2 on Top Layer "NETD30_1_2_L01_P016" (solid, pour order 16): 152.5,90 155.2,90 155.2,90.3 159,90.3 159,82.2 152.5,82.2
IGBT1_G on Top Layer "IGBT1_G_L01_P010" (solid, pour order 10): 140.5,84.2 140.5,80.7 143.5,80.7 147.5,76.7 149.9,76.7 149.9,81.9 150,82 144.9,82 144.9,84.2
IGBT1_G on Top Layer "IGBT1_G_L01_P008" (solid, pour order 8): 145.8,92 141.1,92 141.1,88.3 139.8,87 136,87 136,83.7 144.9,83.7 144.9,88.4 145.8,89.3
NetD27_1_2 on Top Layer "NETD27_1_2_L01_P006" (solid, pour order 6): 149.461,83 145.691,83 145.691,87.773 146.7,88.782 146.7,91.973 151.691,91.973 151.691,85.973
NetQ1_1_3 on Top Layer "NETQ1_1_3_L01_P002" (solid, pour order 2): 141.8,107.5 141.8,94.008 151.816,94.008 151.816,98.4 156.2,98.4 156.2,101 150.816,101 150.816,107.5
COMMON2 on Bottom Layer "COMMON2_L04_P410" (solid, pour order 410): 122.1,121.45 133.3,121.45 133.3,110.05 123.2,110.05 122.1,111.15
COMMON5 on Bottom Layer "COMMON5_L04_P314" (solid, pour order 314): 289.9,121.5 301.1,121.5 301.1,110.1 291,110.1 289.9,111.2
COMMON6 on Bottom Layer "COMMON6_L04_P338" (solid, pour order 338): 256.4,121.6 267.6,121.6 267.6,110.2 257.5,110.2 256.4,111.3
COMMON3 on Bottom Layer "COMMON3_L04_P266" (solid, pour order 266): 223,121.7 234.2,121.7 234.2,110.3 224.1,110.3 223,111.4
COMMON4 on Bottom Layer "COMMON4_L04_P290" (solid, pour order 290): 189.6,121.7 200.8,121.7 200.8,110.3 190.7,110.3 189.6,111.4
NetQ1_4_3 on Bottom Layer "NETQ1_4_3_L04_P292" (solid, pour order 292): 175.4,107.5 175.4,94 185.2,94 185.2,101.5 184.2,101.5 184.2,107.5
+15VT6 on Bottom Layer "+15VT6_L04_P342" (solid, pour order 342): 257.7,107.4 257.7,102.4 258.7,102.4 258.7,98.6 262.7,98.6 262.7,93.9 267.4,93.9 267.4,107.4
NetQ1_6_3 on Bottom Layer "NETQ1_6_3_L04_P340" (solid, pour order 340): 242.2,107.4 242.2,93.9 252,93.9 252,101.4 251,101.4 251,107.4
+15VT5 on Bottom Layer "+15VT5_L04_P318" (solid, pour order 318): 291.2,107.3 291.2,102.3 292.2,102.3 292.2,98.5 296.2,98.5 296.2,94.3 301.1,94.3 301.1,107.3
NetQ1_5_3 on Bottom Layer "NETQ1_5_3_L04_P316" (solid, pour order 316): 275.7,107.3 275.7,93.8 285.5,93.8 285.5,101.3 284.5,101.3 284.5,107.3
NetQ1_3_3 on Bottom Layer "NETQ1_3_3_L04_P268" (solid, pour order 268): 208.8,107.5 208.8,94 218.6,94 218.6,101.5 217.6,101.5 217.6,107.5
+15VT3 on Bottom Layer "+15VT3_L04_P270" (solid, pour order 270): 224.3,107.5 224.3,102.5 225.3,102.5 225.3,98.7 229.3,98.7 229.3,94 233.9,94 233.9,107.5
NetC8_3_2 on Bottom Layer "NETC8_3_2_L04_P272" (solid, pour order 272): 209.8,119.8 209.8,111.3 210.8,110.3 210.8,110.1 222.5,110.1 222.5,119.8
+15VT4 on Bottom Layer "+15VT4_L04_P294" (solid, pour order 294): 190.9,107.5 190.9,102.5 191.9,102.5 191.9,98.7 195.9,98.7 195.9,94 200.8,94 200.8,107.5
+15VT2 on Bottom Layer "+15VT2_L04_P414" (solid, pour order 414): 123.4,107.25 123.4,102.25 124.4,102.25 124.4,98.45 128.4,98.45 128.4,93.75 133.3,93.75 133.3,107.25
NetQ1_2_3 on Bottom Layer "NETQ1_2_3_L04_P416" (solid, pour order 416): 107.9,107.25 107.9,93.75 117.7,93.75 117.7,101.25 116.7,101.25 116.7,107.25
NetC8_2_2 on Bottom Layer "NETC8_2_2_L04_P412" (solid, pour order 412): 108.9,119.55 108.9,111.05 109.9,110.05 109.9,109.85 121.5,109.85 121.5,119.55
NetC8_6_2 on Bottom Layer "NETC8_6_2_L04_P344" (solid, pour order 344): 243.2,119.7 243.2,111.2 244.2,110.2 244.2,110 255.9,110 255.9,119.7
NetC8_5_2 on Bottom Layer "NETC8_5_2_L04_P320" (solid, pour order 320): 276.7,119.6 276.7,111.1 277.7,110.1 277.7,109.9 289.4,109.9 289.4,119.6
NetC8_4_2 on Bottom Layer "NETC8_4_2_L04_P296" (solid, pour order 296): 176.4,119.8 176.4,111.3 177.4,110.3 177.4,110.1 189,110.1 189,119.8
NetC8_1_2 on Bottom Layer "NETC8_1_2_L04_P028" (solid, pour order 28): 143,119.8 143,111.3 144,110.3 144,110.1 155.4,110.1 155.4,119.8
COMMON1 on Bottom Layer "COMMON1_L04_P024" (solid, pour order 24): 156.2,121.7 167.4,121.7 167.4,110.3 157.3,110.3 156.2,111.4
+15VT1 on Bottom Layer "+15VT1_L04_P020" (solid, pour order 20): 157.5,107.5 157.5,102.5 158.5,102.5 158.5,98.7 162.5,98.7 162.5,94 167.4,94 167.4,107.5
NetQ1_1_3 on Bottom Layer "NETQ1_1_3_L04_P018" (solid, pour order 18): 142,107.5 142,94 151.8,94 151.8,101.5 150.8,101.5 150.8,107.5
COMMON3 on Internal Plane 1 (split plane): 233.998,80.1 202.802,80.1 202.802,156.2 233.998,156.2
COMMON4 on Internal Plane 1 (split plane): 200.798,80.1 169.402,80.1 169.402,156.2 200.798,156.2
COMMON5 on Internal Plane 1 (split plane): 303.79,80.1 269.502,80.1 269.502,156.2 303.79,156.2
COMMON6 on Internal Plane 1 (split plane): 267.498,80.1 236.002,80.1 236.002,156.2 267.498,156.2
GND on Internal Plane 1 (split plane): 303.79,164 100.51,164 100.51,199.49 303.79,199.49
COMMON1 on Internal Plane 1 (split plane): 167.398,80.1 136.002,80.1 136.002,156.2 167.398,156.2
COMMON2 on Internal Plane 1 (split plane): 133.998,80.1 100.51,80.1 100.51,156.2 133.998,156.2
-8.5VT6 on Internal Plane 2 (split plane): 249.998,119.8 249.998,98.602 239.402,98.602 239.402,106.098 239.9,106.098 239.998,106.107 240.092,106.136 240.179,106.182 240.255,106.245 240.318,106.321 240.364,106.408 240.393,106.502 240.402,106.6 240.402,115.7 240.402,142.098 244.2,142.098 244.298,142.107 244.392,142.136 244.479,142.182 244.555,142.245 244.618,142.321 244.664,142.408 244.693,142.502 244.702,142.6 244.702,156.2 249.998,156.2
-8.5VT5 on Internal Plane 2 (split plane): 283.498,119.5 283.498,98.302 272.902,98.302 272.902,105.798 273.4,105.798 273.498,105.807 273.592,105.836 273.679,105.882 273.755,105.945 273.818,106.021 273.864,106.108 273.893,106.202 273.902,106.3 273.902,115.4 273.902,141.998 277.7,141.998 277.798,142.007 277.892,142.036 277.979,142.082 278.055,142.145 278.118,142.221 278.164,142.308 278.193,142.402 278.202,142.5 278.202,156.171 283.498,156.171
-8.5VT4 on Internal Plane 2 (split plane): 183.198,119.8 183.198,98.702 172.702,98.702 172.702,106.198 173.2,106.198 173.298,106.207 173.392,106.236 173.479,106.282 173.555,106.345 173.618,106.421 173.664,106.508 173.693,106.602 173.702,106.7 173.702,115.8 173.702,142.198 177.4,142.198 177.498,142.207 177.592,142.236 177.679,142.282 177.755,142.345 177.818,142.421 177.864,142.508 177.893,142.602 177.902,142.7 177.902,156.2 183.198,156.2
-8.5VT3 on Internal Plane 2 (split plane): 216.598,119.9 216.598,98.702 206.002,98.702 206.002,106.198 206.5,106.198 206.598,106.207 206.692,106.236 206.779,106.282 206.855,106.345 206.918,106.421 206.964,106.508 206.993,106.602 207.002,106.7 207.002,115.8 207.002,142.198 210.8,142.198 210.898,142.207 210.992,142.236 211.079,142.282 211.155,142.345 211.218,142.421 211.264,142.508 211.293,142.602 211.302,142.7 211.302,156.2 216.598,156.2
+15VT6 on Internal Plane 2 (split plane): 243.698,143.102 239.9,143.102 239.802,143.093 239.708,143.064 239.621,143.018 239.545,142.955 239.482,142.879 239.436,142.792 239.407,142.698 239.398,142.6 239.398,115.7 239.398,107.102 238.9,107.102 238.802,107.093 238.708,107.064 238.621,107.018 238.545,106.955 238.482,106.879 238.436,106.792 238.407,106.698 238.398,106.6 238.398,98.1 238.407,98.002 238.436,97.908 238.482,97.821 238.545,97.745 238.621,97.682 238.708,97.636 238.802,97.607 238.9,97.598 250.5,97.598 250.598,97.607 250.692,97.636 250.779,97.682 250.855,97.745 250.918,97.821 250.964,97.908 250.993,98.002 251.002,98.1 251.002,119.6 251.002,129.098 267.5,129.098 267.5,79.7 236.1,79.7 236.1,156.2 243.698,156.2
+15VT5 on Internal Plane 2 (split plane): 277.198,143.002 273.4,143.002 273.302,142.993 273.208,142.964 273.121,142.918 273.045,142.855 272.982,142.779 272.936,142.692 272.907,142.598 272.898,142.5 272.898,115.4 272.898,106.802 272.4,106.802 272.302,106.793 272.208,106.764 272.121,106.718 272.045,106.655 271.982,106.579 271.936,106.492 271.907,106.398 271.898,106.3 271.898,97.8 271.907,97.702 271.936,97.608 271.982,97.521 272.045,97.445 272.121,97.382 272.208,97.336 272.302,97.307 272.4,97.298 284,97.298 284.098,97.307 284.192,97.336 284.279,97.382 284.355,97.445 284.418,97.521 284.464,97.608 284.493,97.702 284.502,97.8 284.502,119.5 284.502,128.998 301.298,128.998 301.298,88.6 301.307,88.502 301.336,88.408 301.382,88.321 301.4,88.299 301.4,79.7 269.5,79.7 269.5,156.2 277.198,156.2
+15VT3 on Internal Plane 2 (split plane): 210.298,143.202 206.5,143.202 206.402,143.193 206.308,143.164 206.221,143.118 206.145,143.055 206.082,142.979 206.036,142.892 206.007,142.798 205.998,142.7 205.998,115.8 205.998,107.202 205.5,107.202 205.402,107.193 205.308,107.164 205.221,107.118 205.145,107.055 205.082,106.979 205.036,106.892 205.007,106.798 204.998,106.7 204.998,98.2 205.007,98.102 205.036,98.008 205.082,97.921 205.145,97.845 205.221,97.782 205.308,97.736 205.402,97.707 205.5,97.698 217.1,97.698 217.198,97.707 217.292,97.736 217.379,97.782 217.455,97.845 217.518,97.921 217.564,98.008 217.593,98.102 217.602,98.2 217.602,119.7 217.602,129.198 234,129.198 234,79.7 202.8,79.7 202.8,156.2 210.298,156.2
+5V on Internal Plane 2 (split plane): 303.79,164 100.51,164 100.51,199.49 303.79,199.49
-8.5VT1 on Internal Plane 2 (split plane): 149.798,119.9 149.798,119.7 149.798,98.702 139.202,98.702 139.202,106.198 139.7,106.198 139.798,106.207 139.892,106.236 139.979,106.282 140.055,106.345 140.118,106.421 140.164,106.508 140.193,106.602 140.202,106.7 140.202,119 140.202,142.198 144,142.198 144.098,142.207 144.192,142.236 144.279,142.282 144.355,142.345 144.418,142.421 144.464,142.508 144.493,142.602 144.502,142.7 144.502,156.2 149.798,156.2
-8.5VT2 on Internal Plane 2 (split plane): 115.698,119.6 115.698,119.45 115.698,98.502 105.102,98.502 105.102,105.898 105.5,105.898 105.598,105.907 105.692,105.936 105.779,105.982 105.855,106.045 105.918,106.121 105.964,106.208 105.993,106.302 106.002,106.4 106.002,115.4 106.002,141.948 109.9,141.948 109.998,141.957 110.092,141.986 110.179,142.032 110.255,142.095 110.318,142.171 110.364,142.258 110.393,142.352 110.402,142.45 110.402,156.121 115.698,156.121
+15VT1 on Internal Plane 2 (split plane): 143.498,143.202 139.7,143.202 139.602,143.193 139.508,143.164 139.421,143.118 139.345,143.055 139.282,142.979 139.236,142.892 139.207,142.798 139.198,142.7 139.198,119 139.198,107.202 138.7,107.202 138.602,107.193 138.508,107.164 138.421,107.118 138.345,107.055 138.282,106.979 138.236,106.892 138.207,106.798 138.198,106.7 138.198,98.2 138.207,98.102 138.236,98.008 138.282,97.921 138.345,97.845 138.421,97.782 138.508,97.736 138.602,97.707 138.7,97.698 150.3,97.698 150.398,97.707 150.492,97.736 150.579,97.782 150.655,97.845 150.718,97.921 150.764,98.008 150.793,98.102 150.802,98.2 150.802,119.9 150.802,129.198 167.5,129.198 167.5,80.502 136.3,80.502 136.202,80.493 136.108,80.464 136.021,80.418 135.945,80.355 135.9,80.301 135.9,156.2 143.498,156.2
+15VT4 on Internal Plane 2 (split plane): 176.898,143.202 173.2,143.202 173.102,143.193 173.008,143.164 172.921,143.118 172.845,143.055 172.782,142.979 172.736,142.892 172.707,142.798 172.698,142.7 172.698,115.8 172.698,107.202 172.2,107.202 172.102,107.193 172.008,107.164 171.921,107.118 171.845,107.055 171.782,106.979 171.736,106.892 171.707,106.798 171.698,106.7 171.698,98.2 171.707,98.102 171.736,98.008 171.782,97.921 171.845,97.845 171.921,97.782 172.008,97.736 172.102,97.707 172.2,97.698 183.7,97.698 183.798,97.707 183.892,97.736 183.979,97.782 184.055,97.845 184.118,97.921 184.164,98.008 184.193,98.102 184.202,98.2 184.202,119.7 184.202,129.198 200.8,129.198 200.8,79.7 169.4,79.7 169.4,79.975 169.402,80 169.4,80.025 169.4,156.2 176.898,156.2
+15VT2 on Internal Plane 2 (split plane): 109.398,142.952 105.5,142.952 105.402,142.943 105.308,142.914 105.221,142.868 105.145,142.805 105.082,142.729 105.036,142.642 105.007,142.548 104.998,142.45 104.998,115.4 104.998,106.902 104.6,106.902 104.502,106.893 104.408,106.864 104.321,106.818 104.245,106.755 104.182,106.679 104.136,106.592 104.107,106.498 104.098,106.4 104.098,98 104.107,97.902 104.136,97.808 104.182,97.721 104.245,97.645 104.321,97.582 104.408,97.536 104.502,97.507 104.6,97.498 116.2,97.498 116.298,97.507 116.392,97.536 116.479,97.582 116.555,97.645 116.618,97.721 116.664,97.808 116.693,97.902 116.702,98 116.702,119.6 116.702,128.948 134,128.948 134,79.7 101.9,79.7 101.9,88.525 101.902,88.55 101.902,142.65 101.902,156.2 109.398,156.2

## Other copper
Internal Plane 1 (plane layer: these items are gaps in the copper):
  rectangle: 100,70.2 304.3,80.1
  rectangle: 100.1,156.2 303.9,164
  lines w2: 135,71.1 135,160.9 ; 168.4,71.1 168.4,161.1 ; 201.8,70.7 201.8,161.1 ; 235,70.9 235,161.1 ; 268.5,71.1 268.5,161
Internal Plane 2 (plane layer: these items are gaps in the copper):
  rectangle: 267.5,77.8 269.5,156.5
  rectangle: 234,78.8 236.1,157.2
  rectangle: 200.8,75.8 202.8,157.3
  rectangle: 167.5,78.7 169.4,156.5
  rectangle: 99.9,70.6 304.3,79.7
  rectangle: 101.6,78.1 304.6,79.4
  rectangle: 134,79 135.9,157.7
  rectangle: 114.8,158 115.8,158.4
  rectangle: 301.4,78.5 304.3,164
  rectangle: 99.6,78.6 101.9,156.3
  rectangle: 250.5,129.6 268.802,156.3
  rectangle: 284,129.6 302.302,156.3
  rectangle: 183.7,129.7 202.002,156.4
  rectangle: 217.1,129.7 235.402,156.4
  rectangle: 116.2,129.45 135.3,156.5
  rectangle: 150.3,129.7 168.602,156.4
  rectangle: 99.9,156.2 301.7,164
  lines w0.254: 109.9,156.25 116.2,156.25 ; 144,156.5 150.3,156.5 ; 177.4,156.5 183.7,156.5 ; 210.8,156.5 217.1,156.5 ; 244.2,156.4 250.5,156.4 ; 277.7,156.3 284,156.3 ; 101.4,142.65 101.4,142.65
  lines w1: 101.4,88.55 101.4,142.65 101.4,156.45 ; 101.6,78.75 134.2,78.75 ; 109.9,156.25 109.9,142.45 105.5,142.45 105.5,115.4 105.5,106.4 104.6,106.4 104.6,98 116.2,98 116.2,119.6 ; 116.2,119.45 116.2,156.25 ; 116.3,129.45 134,129.45 ; 136.3,80 168.9,80 ; 144,156.5 144,142.7 139.7,142.7 139.7,119 139.7,106.7 138.7,106.7 138.7,98.2 150.3,98.2 150.3,119.9 ; 150.3,119.7 150.3,156.5 ; 150.4,129.7 168.1,129.7 ; 169.1,79 201.7,79 ; 177.4,156.5 177.4,142.7 173.2,142.7 173.2,115.8 173.2,106.7 172.2,106.7 172.2,98.2 183.7,98.2 183.7,119.8 ; 183.7,119.7 183.7,156.5 ; 183.8,129.7 201.5,129.7 ; 202.5,79 235.1,79 ; 210.8,156.5 210.8,142.7 206.5,142.7 206.5,115.8 206.5,106.7 205.5,106.7 205.5,98.2 217.1,98.2 217.1,119.9 ; 217.1,119.7 217.1,156.5 ; 217.2,129.7 234.9,129.7 ; 235.9,78.9 268.5,78.9 ; 244.2,156.4 244.2,142.6 239.9,142.6 239.9,115.7 239.9,106.6 238.9,106.6 238.9,98.1 250.5,98.1 250.5,119.8 ; 250.5,119.6 250.5,156.4 ; 250.6,129.6 268.3,129.6 ; 269.4,78.8 302,78.8 ; 277.7,156.3 277.7,142.5 273.4,142.5 273.4,115.4 273.4,106.3 272.4,106.3 272.4,97.8 284,97.8 284,119.5 284,156.3 ; 284.1,129.5 301.8,129.5 301.8,88.6

## Silkscreen, mask and mechanical layers (free items; w line width, h text height)
Top Overlay:
  lines w0.254: 160.7,74.2 160.7,74.3 ; 201.9,70.7 202.5,70.7 235.2,70.7 ; 202,70.7 169.1,70.7 168.6,70.7 ; 235.1,70.7 235.7,70.7 268.7,70.7 269.2,70.7 301.9,70.7 301.9,78.2 268.7,78.2 235.2,78.2 202,78.2 168.6,78.2 ; 135.2,70.7 101.4,70.7 100.9,70.7 100.9,78.2 135.2,78.2 ; 135.2,70.7 168.6,70.7 ; 135.2,70.7 135.2,78.2 ; 135.2,78.2 168.6,78.2 ; 168.6,70.7 168.6,78.2 ; 201.8,100 201.8,100

## Text inside footprints (layer, text, board x,y; h text height)
D125: Mechanical 7 "0.181in/4.597mm" at 144.164,116.019 h0.64 r90; Mechanical 7 "0.156in/3.962mm" at 138.817,126.287 h0.64 r90; Mechanical 7 "0.087in/2.21mm" at 138.817,124.242 h0.64 r90; Mechanical 7 "0.063in/1.6mm" at 134.741,114.342 h0.64 r90; Mechanical 7 "0.22in/5.588mm" at 132.201,116.177 h0.64 r90; Mechanical 7 "Alt 2 Padstyle: OX90Y60D30P" at 151.695,109.827 h1.27 r90; Mechanical 7 "Alt 1 Padstyle: OX60Y90D30P" at 149.79,109.827 h1.27 r90; Mechanical 7 "Default Padstyle: RX91Y89D0T" at 147.885,109.51 h1.27 r90
D126: Mechanical 7 "0.181in/4.597mm" at 109.864,115.569 h0.64 r90; Mechanical 7 "0.156in/3.962mm" at 104.518,125.837 h0.64 r90; Mechanical 7 "0.087in/2.21mm" at 104.518,123.792 h0.64 r90; Mechanical 7 "0.063in/1.6mm" at 100.441,113.892 h0.64 r90; Mechanical 7 "0.22in/5.588mm" at 97.901,115.728 h0.64 r90; Mechanical 7 "Alt 2 Padstyle: OX90Y60D30P" at 117.395,109.378 h1.27 r90; Mechanical 7 "Alt 1 Padstyle: OX60Y90D30P" at 115.49,109.378 h1.27 r90; Mechanical 7 "Default Padstyle: RX91Y89D0T" at 113.585,109.06 h1.27 r90
D127: Mechanical 7 "0.181in/4.597mm" at 210.864,116.419 h0.64 r90; Mechanical 7 "0.156in/3.962mm" at 205.517,126.687 h0.64 r90; Mechanical 7 "0.087in/2.21mm" at 205.517,124.642 h0.64 r90; Mechanical 7 "0.063in/1.6mm" at 201.441,114.742 h0.64 r90; Mechanical 7 "0.22in/5.588mm" at 198.901,116.577 h0.64 r90; Mechanical 7 "Alt 2 Padstyle: OX90Y60D30P" at 218.395,110.227 h1.27 r90; Mechanical 7 "Alt 1 Padstyle: OX60Y90D30P" at 216.49,110.227 h1.27 r90; Mechanical 7 "Default Padstyle: RX91Y89D0T" at 214.585,109.91 h1.27 r90